# Allegro board Mini EVM_F_V3.brd
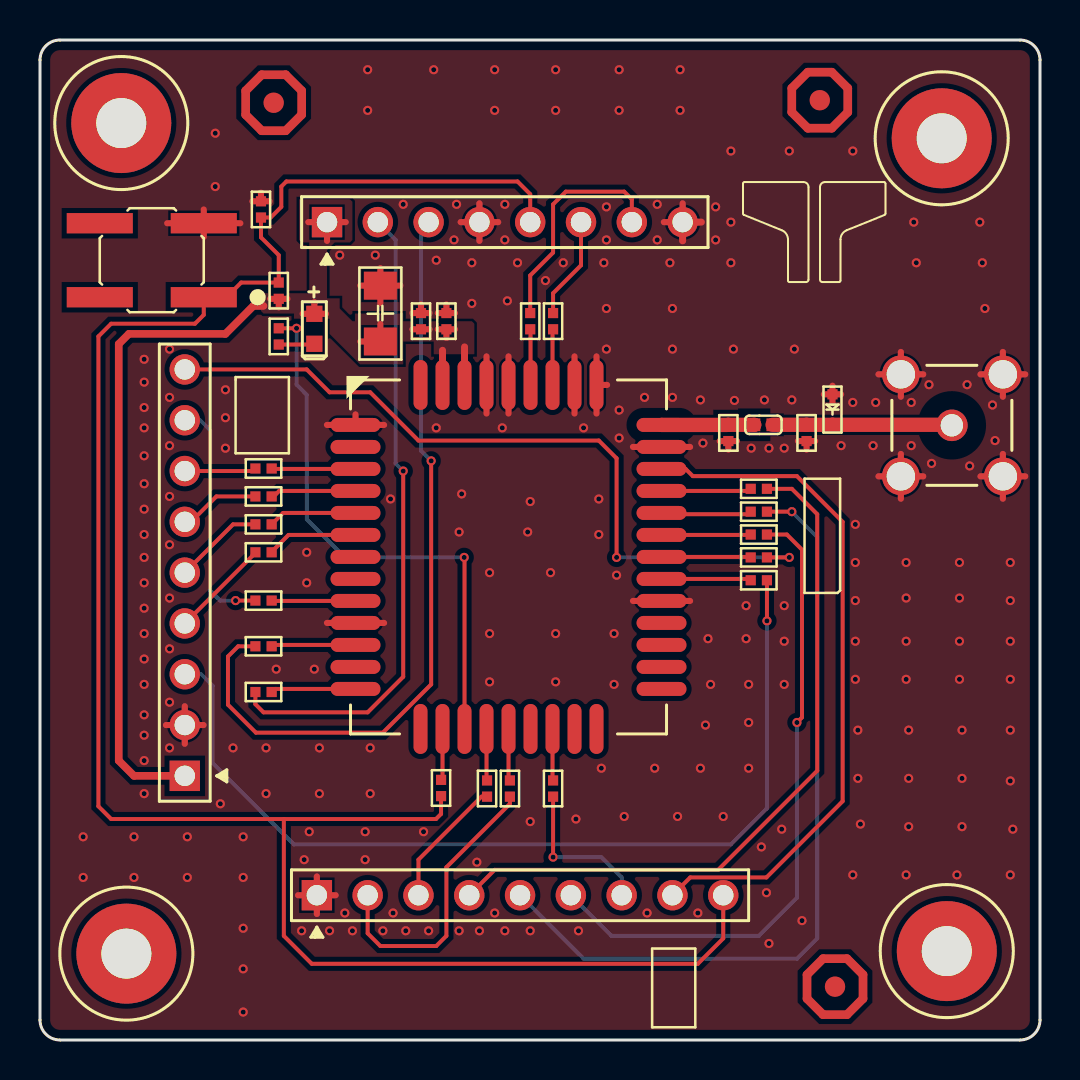
[diagram p0: board, top side]
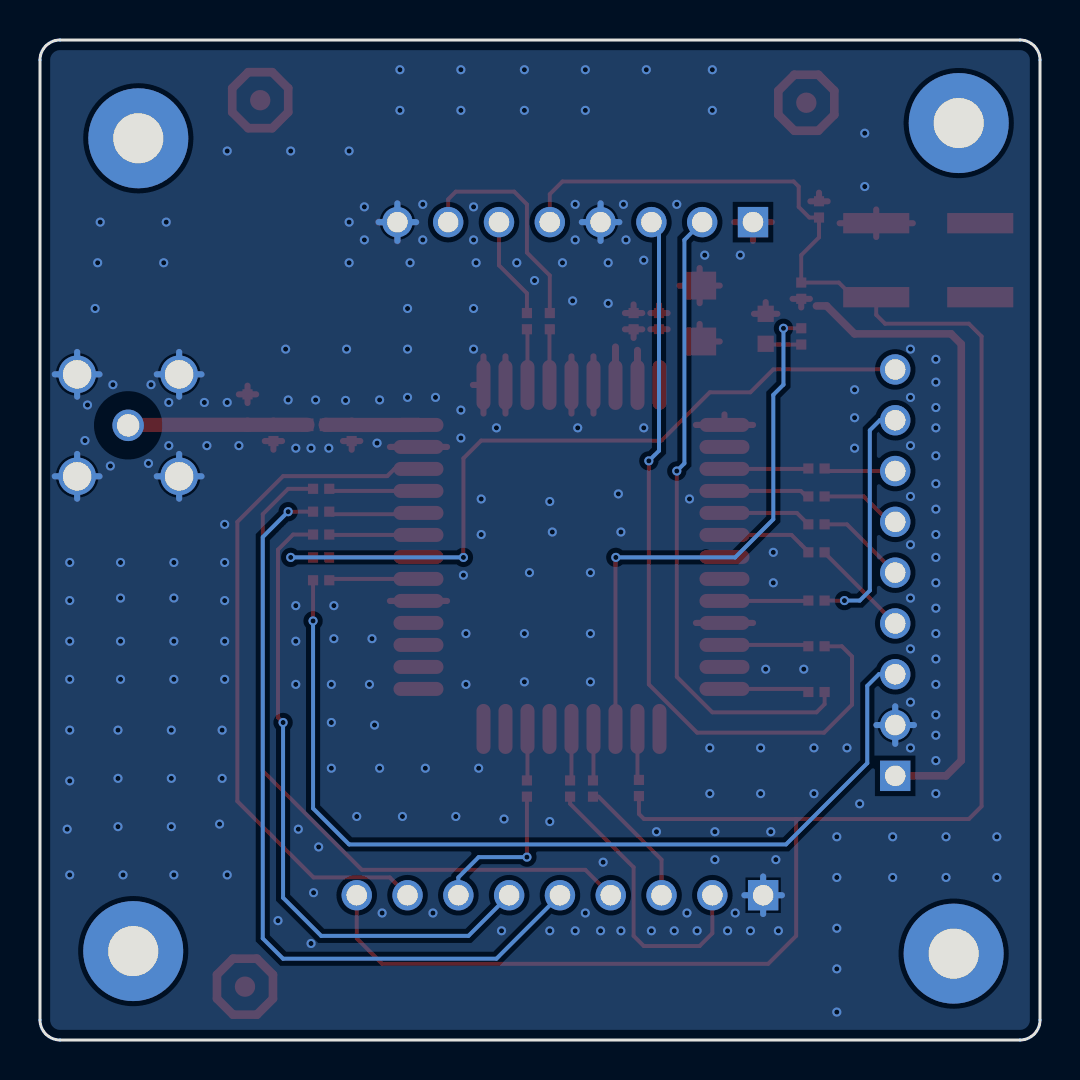
[diagram p1: board, bottom side, seen from below]

Outline 50 x 50 mm; copper layers: TOP, BOTTOM. Coordinates in mm from the lower left corner of the outline.
Outline path: 0,49 0,1 arc(0.29,0.29) 1,0 49,0 arc(49.71,0.29) 50,1 50,49 arc(49.71,49.71) 49,50 1,50 arc(0.29,49.71) 0,49

## Placement (name value [footprint] x y rotation side)
C1  220pf  [C0402]  36.17 30.76 180 top
C2  1nF  [SC0402]  11.05 41.53 90 top
C3  47uF/6.3V  [SC1206]  17.02 36.32 90 top
C4  100nF  [SC0402]  19.05 35.94 90 top
C5  1nF  [SC0402]  20.32 35.94 90 top
D1  LED_G  [LED0603]  13.72 35.56 270 top
D2  TVS  [SD0603]  39.62 31.52 270 top
FM1  NC  [MARK40C]  11.68 46.86 0 top
FM2  NC  [MARK40C]  38.99 46.99 0 top
FM3  NC  [MARK40C]  39.75 2.67 0 top
J1  9P  [DPI_2_54_9P]  13.84 7.24 0 top
J2  9P  [DPI_2_54_9P]  7.24 13.21 90 top
J3  -  [DPI_2_54_8P]  14.35 40.89 0 top
L1  DNP  [SL0402]  38.33 30.35 270 top
L2  DNP  [SL0402]  34.42 30.35 270 top
M1  -  [SMTSO2070CTJ]  45.09 45.09 0 top
NOREF  SMTSO2070CTJ  [unnamed]  4.32 4.32 0 top
NOREF#2  SMTSO2070CTJ  [unnamed]  4.06 45.85 0 top
NOREF#3  SMTSO2070CTJ  [unnamed]  45.34 4.45 0 top
R1  10K  [SR0402]  11.94 37.47 270 top
R2  100  [SR0402]  35.94 27.56 0 top
R3  100  [SR0402]  35.94 26.42 0 top
R4  100  [SR0402]  35.94 25.27 0 top
R5  100  [SR0402]  35.94 24.13 0 top
R6  100  [SR0402]  35.94 22.99 0 top
R7  100  [SR0402]  25.65 35.94 90 top
R8  100  [SR0402]  25.65 12.57 270 top
R9  100  [SR0402]  24.51 35.94 90 top
R10  100  [SR0402]  23.5 12.57 90 top
R11  100  [SR0402]  22.35 12.57 90 top
R13  100  [SR0402]  20.05 12.6 270 top
R14  100  [SR0402]  11.18 17.4 0 top
R15  100  [SR0402]  11.18 19.68 0 top
R16  2K  [SR0402]  11.94 35.18 270 top
R17  100  [SR0402]  11.18 21.97 180 top
R18  100  [SR0402]  11.18 24.38 180 top
R19  100  [SR0402]  11.18 25.78 180 top
R20  100  [SR0402]  11.18 27.18 180 top
R21  100  [SR0402]  11.18 28.57 180 top
S4  -  [TS5215A]  5.59 38.99 180 top
U1  TP1107  [UNB_E_F]  23.43 24.15 0 top
XS1  CON5_0  [RF5_5R1_6X6LP]  45.59 30.73 0 top

## Library data of the parts
C1 C2 C4 C5 = C0402
C3 = CAP NP
D1 = LED_1
D2 = ON_ESD9L50ST5G_0
FM1-FM3 = MARK
J1 J2 = DPI_2_54_9P
J3 = DPI_2_54_8P
L1 L2 = L0402
M1 = HOLE
R1-R11 R13-R21 = R0402_0
S4 = TS5215A
U1 = TP1107
XS1 = CON5_0

## Footprints (pads in the part's own frame, mm; a bottom-side part is the same pattern mirrored in y, then rotated)
C0402
  rect 0.61x0.635 smd: 1(-0.46,0) 2(0.46,0)
DPI_2_54_8P
  rect 1.519x1.519 hole 1.021: 1(0,0)
  round 1.519 hole 1.021: 2(2.54,0) 3(5.08,0) 4(7.62,0) 5(10.16,0) 6(12.7,0) 7(15.24,0) 8(17.78,0)
DPI_2_54_9P
  rect 1.519x1.519 hole 1.021: 1(0,0)
  round 1.519 hole 1.021: 2(2.54,0) 3(5.08,0) 4(7.62,0) 5(10.16,0) 6(12.7,0) 7(15.24,0) 8(17.78,0) 9(20.32,0)
LED0603
  rect 0.813x0.813 smd: 1(-0.749,0) 2(0.749,0)
MARK40C
  round 1.016 smd: 1(0,0)
RF5_5R1_6X6LP
  round 1.575 hole 1.118: 1(0,0)
  round 1.88 hole 1.422: 2(-2.55,2.55) 3(2.55,2.55) 4(-2.55,-2.55) 5(2.55,-2.55)
SC0402
  rect 0.508x0.508 smd: 1(-0.406,0) 2(0.406,0)
SC1206
  rect 1.397x1.651 smd: 1(-1.397,0) 2(1.397,0)
SD0603
  rect 0.508x0.508 smd: 1(-0.762,0) 2(0.762,0)
SL0402
  rect 0.508x0.508 smd: 1(-0.406,0) 2(0.406,0)
SMTSO2070CTJ
  round 5 hole 2.5: 1(0,0)
SR0402
  rect 0.508x0.508 smd: 1(-0.406,0) 2(0.406,0)
TS5215A
  rect 3.302x1.016 smd: 1(-2.6,1.85) 2(2.6,1.85) 3(-2.6,-1.85) 4(2.6,-1.85)
UNB_E_F
  oval 2.5x0.7 smd: 1(-7.65,6.6) 2(-7.65,5.5) 3(-7.65,4.4) 4(-7.65,3.3) 5(-7.65,2.2) 6(-7.65,1.1) 7(-7.65,0) 8(-7.65,-1.1) 9(-7.65,-2.2) 10(-7.65,-3.3) 11(-7.65,-4.4) 12(-7.65,-5.5) 13(-7.65,-6.6) 23(7.65,-6.6) 24(7.65,-5.5) 25(7.65,-4.4) 26(7.65,-3.3) 27(7.65,-2.2) 28(7.65,-1.1) 29(7.65,0) 30(7.65,1.1) 31(7.65,2.2) 32(7.65,3.3) 33(7.65,4.4) 34(7.65,5.5) 35(7.65,6.6)
  oval 0.7x2.5 smd: 14(-4.4,-8.6) 15(-3.3,-8.6) 16(-2.2,-8.6) 17(-1.1,-8.6) 18(0,-8.6) 19(1.1,-8.6) 20(2.2,-8.6) 21(3.3,-8.6) 22(4.4,-8.6) 36(4.4,8.6) 37(3.3,8.6) 38(2.2,8.6) 39(1.1,8.6) 40(0,8.6) 41(-1.1,8.6) 42(-2.2,8.6) 43(-3.3,8.6) 44(-4.4,8.6)
unnamed
  round 5 hole 2.5: 1(0,0)

## Nets
GND: C2.2(B0) C3.2 C4.2(B0) C5.2(B0) D2.1(+) J1.1 J2.2 J3.4 J3.8 L1.2(N2) L2.2(N2) S4.3 U1.1(GND1) U1.10(GND2) U1.27(GND3) U1.34(GND4) U1.36(GND5) U1.37(GND6) U1.40(GND7) U1.41(GND8) XS1.2(G1) XS1.3(G2) XS1.4(G3) XS1.5(G4)
VCC_3V3: C3.1 C4.1(A0) C5.1(A0) D1.1(A) J2.1 J3.1 R1.2(B0) U1.42(VDD1) U1.43(VDD2)
ADC_PA00: J2.8 R17.2(B0)
ANT: C1.2(B0) L2.1(N1) U1.35(RF_ANT)
AT_RXD: J1.3 R11.1(A0)
AT_TXD: J1.2 R10.1(A0)
DB_RXD: J3.6 R7.2(B0)
DB_TXD: J3.7 R9.2(B0)
LEDG_PB04: R16.1(A0) U1.16(LED_NET)
NRST: C2.1(A0) J1.9 J3.5 R1.1(A0) R13.2(B0) S4.1
PA02: J2.9 R5.2(B0)
PB03/RI: J1.7 R8.2(B0)
PB06/WAKE: J1.8 U1.33(GPIO4/WAKE)
PB08/I2C0_SCL: J1.6 R4.2(B0)
PB09/I2C0_SDA: J1.5 R3.2(B0)
PB11: J1.4 R2.2(B0)
RST_OUT: J2.3 R6.2(B0)
SPICLK: J2.5 R19.2(B0)
SPICS: J2.4 R18.2(B0)
SPIMISO: J2.7 R21.2(B0)
SPIMOSI: J2.6 R20.2(B0)
SWCLK: J3.2 R14.1(A0)
SWDIO: J3.3 R15.1(A0)
N17093938: R4.1(A0) U1.30(GPIO1)
N17093944: R3.1(A0) U1.31(GPIO2)
N17093949: R5.1(A0) U1.29(GPIO06)
N17093959: R18.1(A0) U1.6(SPI_CS)
N17093964: R21.1(A0) U1.3(SPI_MISO)
N17093966: R20.1(A0) U1.4(SPI_MOSI)
N17093971: R19.1(A0) U1.5(SPI_CLK)
N17093981: R14.2(B0) U1.13(SWCLK)
N17093983: R15.2(B0) U1.11(SWDIO)
N17094039: R17.1(A0) U1.9(ADC)
N17094052: R8.1(A0) U1.20(RI)
N17097389: R13.1(A0) U1.15(RESET_N)
N17203560: R7.1(A0) U1.38(DEG_RXD)
N17203563: R9.1(A0) U1.39(DEG_TXD)
N17203734: R11.2(B0) U1.17(AT_RXD)
N17203737: R10.2(B0) U1.18(AT_TXD)
N17203806: D1.2(B) R16.2(B0)
N17223382: R2.1(A0) U1.32(GPIO3)
N17223948: R6.1(A0) U1.28(RST_OUT)
N17231795: C1.1(A0) D2.2(-) L1.1(N1) XS1.1(ANT)

Pads without a net: FM1 1; FM2 1; FM3 1; M1 1; NOREF 1; NOREF#2 1; NOREF#3 1; S4 2 4; U1 2 7 8 12 14 19 21 22 23 24 25 26 44

## Via types
v1: diameter 0.457, hole 0.254, TOP to BOTTOM, 237 vias

## Routing (per net, layer and track width the routed paths; a pad name or vN(x,y) marks a point on that pad's centre or on a via; arc(x,y) is an arc through that point)
GND: length 106.7
  TOP w0.305: C5.2 20.32,36.78 ; C5.2 19.89,36.35 ; C5.2 20.75,36.35 ; 32.5,21.95 U1.27 29.65,21.95 ; 47.03,28.18 XS1.5 ; XS1.5 48.14,29.3 ; XS1.5 48.14,27.07 ; XS1.5 49.26,28.18 ; XS1.3 49.26,33.28 ; XS1.3 48.14,34.4 ; XS1.3 48.14,32.17 ; XS1.3 47.03,33.28 ; 29.65,29.65 U1.34 32.5,29.65 ; 39.19,32.28 D2.1 ; D2.1 39.62,32.72 ; D2.1 40.06,32.28 ; D2.1 39.62,31.85 ; C4.2 19.05,36.78 ; C4.2 18.62,36.35 ; C4.2 19.48,36.35 ; XS1.4 44.16,28.18 ; XS1.4 43.04,29.3 ; XS1.4 43.04,27.07 ; XS1.4 41.93,28.18 ; 14.35,20.85 U1.10 17.2,20.85 ; 22.33,31.32 U1.41 22.33,34.18 ; 13.84,6.3 J1.1 ; J1.1 14.78,7.24 ; J1.1 12.91,7.24 ; J1.1 13.84,8.18 ; L1.2 38.76,29.95 ; L1.2 38.33,29.52 ; L1.2 37.9,29.95 ; 33.99,29.95 L2.2 ; L2.2 34.85,29.95 ; L2.2 34.42,29.52 ; C2.2 11.05,42.37 ; C2.2 10.62,41.93 ; C2.2 11.48,41.93 ; 32.13,41.83 J3.8 31.19,40.89 ; 21.03,40.89 J3.4 ; J3.4 22.91,40.89 ; J3.4 21.97,41.83 ; J3.4 21.97,39.96 ; 23.43,31.32 U1.40 23.43,34.18 ; C3.2 18.02,37.72 ; C3.2 17.02,38.6 ; C3.2 16.01,37.72 ; C3.2 17.02,36.84 ; 26.73,31.32 U1.37 26.73,34.18 ; 43.04,32.17 XS1.2 ; XS1.2 44.16,33.28 ; XS1.2 43.04,34.4 ; XS1.2 41.93,33.28 ; J2.2 7.24,16.69 ; J2.2 8.18,15.75 ; J2.2 7.24,14.81 ; J2.2 6.3,15.75 ; 6.36,40.84 S4.3 ; S4.3 8.19,40.15 ; S4.3 10.02,40.84 ; S4.3 8.19,41.52 ; U1.36 27.83,34.18 ; U1.36 27.83,31.32 ; U1.36 28.35,32.75 ; 14.35,30.75 U1.1 ; U1.1 15.78,31.28 ; U1.1 17.2,30.75
  TOP w0.347: 33.07,40.89 J3.8 32.13,39.96
  BOTTOM w0.305: J3.4 21.97,41.83 ; J3.4 21.03,40.89 ; J3.4 21.97,39.96 ; J3.4 22.91,40.89 ; 47.03,28.18 XS1.5 ; XS1.5 48.14,29.3 ; XS1.5 48.14,27.07 ; XS1.5 49.26,28.18 ; J1.1 13.84,8.18 ; J1.1 14.78,7.24 ; J1.1 12.91,7.24 ; J1.1 13.84,6.3 ; XS1.2 43.04,34.4 ; XS1.2 41.93,33.28 ; XS1.2 43.04,32.17 ; XS1.2 44.16,33.28 ; 41.93,28.18 XS1.4 ; XS1.4 43.04,29.3 ; XS1.4 44.16,28.18 ; XS1.4 43.04,27.07 ; 47.03,33.28 XS1.3 ; XS1.3 49.26,33.28 ; XS1.3 48.14,34.4 ; XS1.3 48.14,32.17 ; J2.2 8.18,15.75 ; J2.2 6.3,15.75 ; J2.2 7.24,14.81 ; J2.2 7.24,16.69 ; J3.8 32.13,41.83 ; J3.8 33.07,40.89 ; J3.8 32.13,39.96 ; J3.8 31.19,40.89
  vias: v1(2.16,10.16) v1(2.16,8.13) v1(4.7,10.16) v1(4.7,8.13) v1(5.21,34.04) v1(5.21,32.89) v1(5.21,31.62) v1(5.21,30.61) v1(5.21,29.21) v1(5.21,27.81) v1(5.21,26.54) v1(5.21,25.27) v1(5.21,24.13) v1(5.21,22.86) v1(5.21,21.59) v1(5.21,20.32) v1(5.21,19.05) v1(5.21,17.78) v1(5.21,16.26) v1(5.21,15.24) v1(5.21,13.97) v1(5.21,12.32) v1(6.48,34.54) v1(6.48,32.13) v1(6.48,29.72) v1(6.48,27.18) v1(6.48,24.77) v1(6.48,22.1) v1(6.48,19.56) v1(6.48,16.89) v1(6.48,14.61) v1(7.37,10.16) v1(7.37,8.13) v1(8.76,45.34) v1(8.76,42.67) v1(9.02,11.81) v1(9.27,32.51) v1(9.27,31.11) v1(9.27,29.59) v1(9.65,14.61) v1(10.16,10.16) v1(10.16,8.13) v1(10.16,5.59) v1(10.16,3.56) v1(10.16,1.4) v1(11.3,14.61) v1(11.3,12.32) v1(11.81,18.54) v1(13.08,5.46) v1(13.21,9.02) v1(13.34,24.38) v1(13.34,22.86) v1(13.46,10.41) v1(13.72,18.54) v1(13.97,14.61) v1(13.97,12.32) v1(14.48,5.46) v1(14.99,39.24) v1(15.24,6.35) v1(15.62,5.46) v1(16.26,10.41) v1(16.26,9.02) v1(16.38,48.51) v1(16.38,46.48) v1(16.51,14.61) v1(16.51,12.32) v1(16.76,39.24) v1(17.14,5.46) v1(17.53,27.05) v1(17.65,6.35) v1(18.16,41.78) v1(18.29,5.46) v1(19.18,10.41) v1(19.43,5.46) v1(19.68,48.51) v1(19.81,38.99) v1(19.81,30.61) v1(20.7,40.01) v1(20.83,41.78) v1(20.95,25.4) v1(20.95,5.46) v1(21.08,27.3) v1(21.59,38.86) v1(21.59,36.83) v1(21.84,8.89) v1(21.97,5.46) v1(22.48,23.37) v1(22.48,20.32) v1(22.48,17.91) v1(22.73,48.51) v1(22.73,46.48) v1(22.73,6.35) v1(23.11,30.61) v1(23.24,41.78) v1(23.24,40.01) v1(23.24,5.46) v1(23.37,36.96) v1(23.88,38.86) v1(24.38,25.4) v1(24.51,26.92) v1(24.51,10.92) v1(24.51,5.46) v1(25.27,37.97) v1(25.53,23.37) v1(25.78,48.51) v1(25.78,46.48) v1(25.78,20.32) v1(25.78,17.91) v1(26.16,38.86) v1(26.8,11.05) v1(26.92,5.46) v1(27.18,30.61) v1(27.94,27.05) v1(27.94,25.27) v1(28.07,13.59) v1(28.19,38.86) v1(28.32,41.66) v1(28.32,40.01) v1(28.32,36.58) v1(28.32,34.54) v1(28.7,20.32) v1(28.7,17.78) v1(28.83,23.24) v1(28.96,48.51) v1(28.96,46.48) v1(28.96,31.5) v1(28.96,30.1) v1(29.21,11.18) v1(30.23,32.13) v1(30.35,6.35) v1(30.73,13.59) v1(30.86,41.78) v1(30.86,40.01) v1(31.5,38.86) v1(31.62,36.58) v1(31.62,34.54) v1(31.62,32.13) v1(31.88,11.18) v1(32,48.51) v1(32,46.48) v1(32.89,6.35) v1(33.02,32) v1(33.02,13.59) v1(33.15,29.84) v1(33.27,15.75) v1(33.4,20.07) v1(33.53,17.78) v1(33.78,41.66) v1(33.78,40.01) v1(34.16,11.18) v1(34.54,44.45) v1(34.54,40.89) v1(34.54,38.86) v1(34.67,34.54) v1(34.72,31.98) v1(35.31,21.72) v1(35.31,20.07) v1(35.43,17.78) v1(35.43,15.88) v1(35.43,13.59) v1(35.56,29.59) v1(36.07,9.65) v1(36.22,32) v1(36.32,7.37) v1(36.45,29.59) v1(36.45,4.83) v1(37.08,10.54) v1(37.21,29.59) v1(37.21,21.72) v1(37.21,19.94) v1(37.21,17.78) v1(37.47,44.45) v1(37.59,32) v1(37.72,34.54) v1(38.1,5.97) v1(40.06,29.72) v1(40.64,44.45) v1(40.64,31.88) v1(40.64,8.26) v1(40.77,25.78) v1(40.77,23.88) v1(40.77,21.97) v1(40.77,19.94) v1(40.77,18.03) v1(40.89,15.49) v1(40.89,13.08) v1(41.02,10.79) v1(41.66,29.72) v1(41.78,31.88) v1(43.31,23.88) v1(43.31,22.1) v1(43.31,19.94) v1(43.31,18.03) v1(43.31,8.26) v1(43.43,15.49) v1(43.43,13.08) v1(43.43,10.67) v1(43.56,31.88) v1(43.56,29.72) v1(43.69,40.89) v1(43.81,38.86) v1(44.45,32.77) v1(44.58,28.83) v1(45.85,8.26) v1(45.97,23.88) v1(45.97,22.1) v1(45.97,19.94) v1(45.97,18.03) v1(46.1,15.49) v1(46.1,13.08) v1(46.1,10.67) v1(46.35,32.77) v1(46.48,28.7) v1(46.99,40.89) v1(47.12,38.86) v1(47.24,36.58) v1(47.62,31.75) v1(47.75,29.97) v1(48.51,23.88) v1(48.51,21.97) v1(48.51,19.94) v1(48.51,18.03) v1(48.51,15.49) v1(48.51,12.95) v1(48.51,8.26) v1(48.64,10.54)
VCC_3V3: length 46
  TOP w0.305: 13.13,36.31 D1.1 ; D1.1 14.3,36.31 ; D1.1 13.72,36.89 ; 16.01,34.92 17.02,34.92 17.02,35.8 ; 19.48,35.54 C4.1 18.62,35.54 ; C5.1 20.75,35.54 ; C5.1 19.89,35.54 ; C5.1 20.32,35.1 ; 14.35,39.96 J3.1 ; J3.1 15.29,40.89 ; J3.1 13.41,40.89 ; 11.94,36.63 R1.2 ; R1.2 11.51,37.06 ; R1.2 12.37,37.06
  TOP w0.347: 20.13,34.48 U1.43 ; 21.23,34.65 U1.42
  TOP w0.381: J2.1 4.7,13.21 3.94,13.97 3.94,34.8 4.45,35.31 9.27,35.31 10.67,36.7 11.18,36.7
ADC_PA00: length 12.1
  TOP w0.198: v1(9.78,21.97) R17.2
  BOTTOM w0.198: 7.11,30.99 J2.8 8.01,30.99 8.51,30.48 8.51,22.47 9.01,21.97 v1(9.78,21.97)
ANT: length 4.6
  TOP w0.711: U1.35 34.41,30.75 L2.1 35.71,30.76 C1.2
AT_RXD: length 6.5
  TOP w0.198: J1.3 18.92,9.02 22.07,12.17 R11.1
AT_TXD: length 14.6
  TOP w0.198: J1.2 16.38,5.33 17.02,4.7 19.81,4.7 20.32,5.21 20.32,8.64 23.5,11.81 R10.1
DB_RXD: length 5.1
  TOP w0.198: R7.2 25.65,37.34 27.05,38.73 J3.6
DB_TXD: length 11.4
  TOP w0.198: R9.2 24.51,38.23 25.65,39.37 25.65,41.78 26.29,42.42 29.21,42.42 29.59,42.04 J3.7
LEDG_PB04: length 27.9
  TOP w0.198: U1.16 21.23,24.11 v1(21.21,24.13) ; v1(12.83,35.58) R16.1
  BOTTOM w0.198: v1(12.83,35.58) 12.83,32.77 13.34,32.26 13.34,26.04 15.24,24.13 v1(21.21,24.13)
NRST: length 103.7
  TOP w0.198: J1.9 34.16,5.08 32.89,3.81 13.59,3.81 12.19,5.21 12.19,11.05 ; 12.19,11.05 19.8,11.05 20.05,11.3 R13.2 ; 12.19,11.05 3.56,11.05 2.92,11.68 2.92,35.18 3.56,35.81 7.75,35.81 8.19,36.25 S4.1 9.33,37.14 10.06,37.87 R1.1 11.94,39.24 11.05,40.13 C2.1 11.53,41.12 12.06,41.66 12.06,42.67 12.32,42.93 23.88,42.93 24.51,42.29 J3.5
PA02: length 38.1
  TOP w0.198: v1(28.83,24.13) 28.83,29.08 27.94,29.97 18.92,29.97 16.51,32.38 14.48,32.38 13.34,33.53 J2.9 ; v1(37.47,24.13) R5.2
  BOTTOM w0.198: v1(28.83,24.13) v1(37.47,24.13)
PB03/RI: length 7.8
  TOP w0.198: R8.2 v1(25.65,9.14)
  BOTTOM w0.198: J1.7 29.08,8.13 28.07,9.14 v1(25.65,9.14)
PB06/WAKE: length 34.6
  TOP w0.198: U1.33 32.28,28.55 32.64,28.19 37.85,28.19 40.13,25.91 40.13,11.94 36.32,8.13 32.51,8.13 J1.8
PB08/I2C0_SCL: length 32.5
  TOP w0.198: R4.2 37.34,25.27 38.1,24.52 38.1,16.13 v1(37.85,15.88)
  BOTTOM w0.198: J1.6 28.57,5.21 35.94,5.21 37.85,7.11 v1(37.85,15.88)
PB09/I2C0_SDA: length 39.7
  TOP w0.198: R3.2 v1(37.59,26.42)
  BOTTOM w0.198: v1(37.59,26.42) 38.86,25.15 38.86,5.08 37.85,4.06 27.18,4.06 J1.5
PB11: length 35.8
  TOP w0.198: J1.4 22.73,8.51 33.91,8.51 38.86,13.46 38.86,26.29 37.59,27.56 R2.2
RST_OUT: length 47.2
  TOP w0.198: R6.2 v1(36.35,20.95)
  BOTTOM w0.198: v1(36.35,20.95) 36.35,11.58 34.54,9.78 12.7,9.78 8.64,13.84 8.64,17.71 8.06,18.29 J2.3 7.11,18.29
SPICLK: length 4.5
  TOP w0.198: R19.2 9.65,25.78 J2.5
SPICS: length 5
  TOP w0.198: R18.2 10.77,24.36 J2.4
SPIMISO: length 3.6
  TOP w0.198: J2.7 10.64,28.45 R21.2
SPIMOSI: length 4.1
  TOP w0.198: 10.79,27.18 R20.2 8.82,27.18 7.55,25.91 J2.6
SWCLK: length 32.2
  TOP w0.198: v1(18.16,28.45) 18.16,18.16 16.38,16.38 11.18,16.38 10.77,16.79 R14.1
  BOTTOM w0.198: v1(18.16,28.45) 17.78,28.83 17.78,40.01 J3.2
SWDIO: length 39.2
  TOP w0.198: v1(19.56,28.96) 19.56,17.78 17.14,15.37 10.79,15.37 9.4,16.76 9.4,19.18 9.91,19.68 R15.1
  BOTTOM w0.198: v1(19.56,28.96) 19.05,29.46 19.05,40.51 J3.3
N17093938: length 4.5
  TOP w0.198: R4.1 35.51,25.25 U1.30
N17093944: length 4.5
  TOP w0.198: R3.1 35.41,26.29 31.14,26.29 U1.31
N17093949: length 4.5
  TOP w0.198: R5.1 35.51,24.15 U1.29
N17093959: length 4.6
  TOP w0.198: 11.95,24.78 12.43,25.25 U1.6
  TOP w0.203: 11.95,24.78 11.58,24.41 R18.1
N17093964: length 4.2
  TOP w0.198: U1.3 11.6,28.55 R21.1
N17093966: length 4.3
  TOP w0.198: U1.4 11.96,27.45 11.76,27.25
  TOP w0.203: R20.1 11.68,27.18 11.76,27.25
N17093971: length 4.5
  TOP w0.198: 11.56,25.78 R19.1 12.15,26.35 U1.5
N17093981: length 4.3
  TOP w0.198: R14.2 11.74,17.55 U1.13
N17093983: length 4.2
  TOP w0.198: R15.2 11.65,19.75 U1.11
N17094039: length 4.2
  TOP w0.198: R17.1 11.6,21.95 U1.9
N17094052: length 2.6
  TOP w0.198: R8.1 25.63,13.01 U1.20
N17097389: length 2.6
  TOP w0.198: R13.1 20.13,13.08 U1.15
N17203560: length 2.8
  TOP w0.198: R7.1 25.63,35.51 U1.38
N17203563: length 2.8
  TOP w0.198: U1.39 24.53,35.52 R9.1
N17203734: length 2.6
  TOP w0.198: U1.17 22.33,13.01 R11.2
N17203737: length 2.6
  TOP w0.198: R10.2 23.43,13.05 U1.18
N17203806: length 1.8
  TOP w0.198: R16.2 13.68,34.77 D1.2
N17223382: length 4.5
  TOP w0.198: U1.32 35.43,27.45 R2.1
N17223948: length 4.5
  TOP w0.198: U1.28 35.47,23.05 R6.1
N17231795: length 9
  TOP w0.711: XS1.1 45.57,30.76 D2.2 39.62,30.76 L1.1 38.33,30.76 C1.1

## Copper pours and planes (outline as drawn; the poured copper is in the pictures)
GND on TOP: 1,0.51 0.65,0.65 0.51,1 0.51,49 0.65,49.35 1,49.49 49,49.49 49.35,49.35 49.49,49 49.49,1 49.35,0.65 49,0.51 ; 12 cut-outs
GND on BOTTOM: 1,0.51 0.65,0.65 0.51,1 0.51,49 0.65,49.35 1,49.49 49,49.49 49.35,49.35 49.49,49 49.49,1 49.35,0.65 49,0.51
VCC_3V3 on TOP: 16,33.78 14.48,35.31 14.48,36.07 12.7,36.07 12.7,36.32 11.18,36.32 11.05,36.45 11.05,37.34 13.46,37.34 13.46,39.88 13.08,39.88 12.95,40.01 12.95,42.04 15.49,42.04 15.62,41.91 15.62,40.01 15.49,39.88 14.73,39.88 14.35,39.5 14.35,37.08 14.99,37.08 14.99,36.58 15.62,35.94 15.75,35.94 15.75,36.32 18.16,36.32 18.16,35.94 21.59,35.94 21.72,35.81 21.72,34.29 19.68,34.29 19.68,34.92 18.16,34.92 18.16,33.78
